# Altium PCB PCB.PcbDoc
Units mm, origin at the board's own origin, x right, y up, seen from the top; angles counter-clockwise.
Board outline 87.17 x 48.5 mm, 2 copper layers (Top Layer, Bottom Layer), stack 0.781 mm thick; 42 components, 27 nets, 111 pads, 0 vias.
Unrouted connection lines stored in the file: 63.
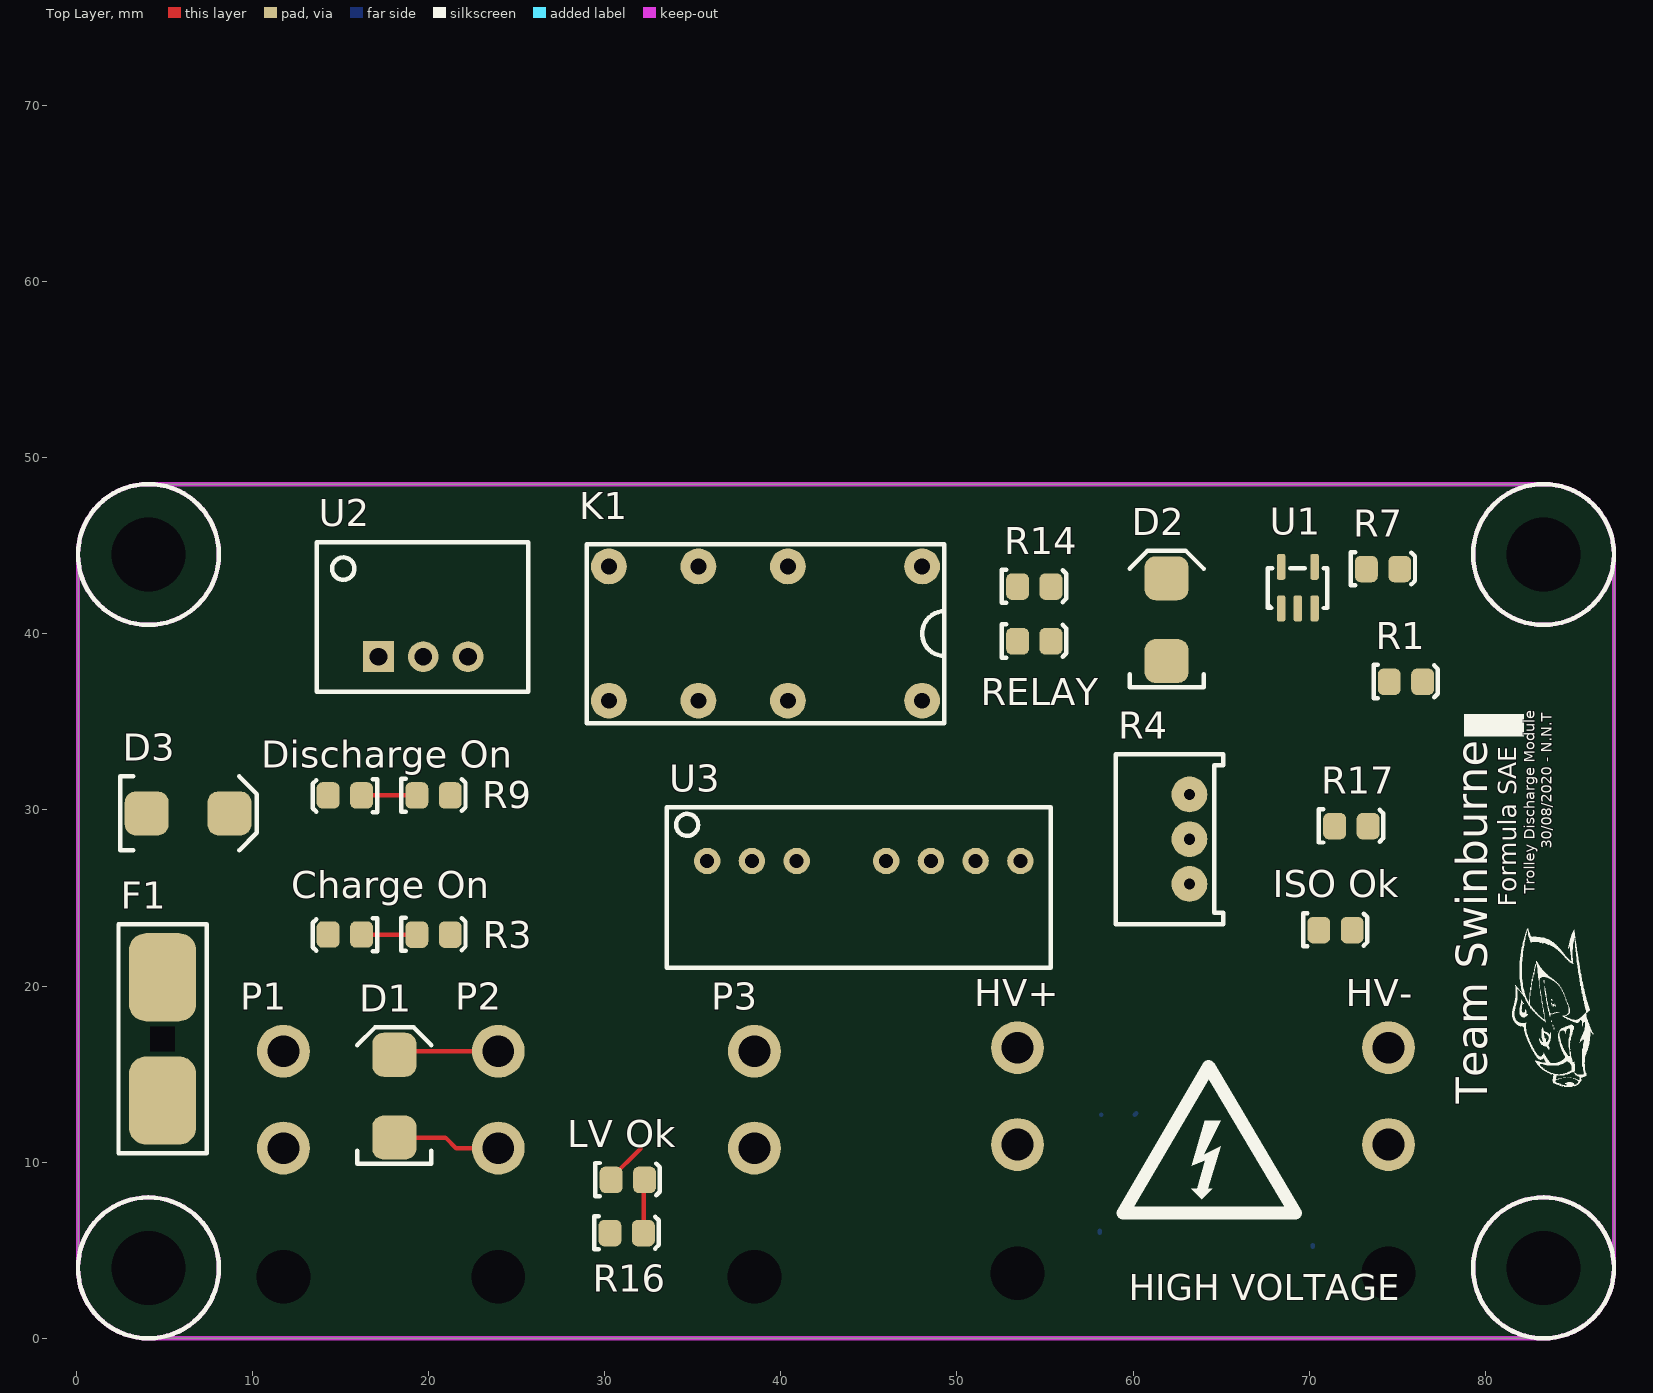
[diagram p0: Top Layer view]
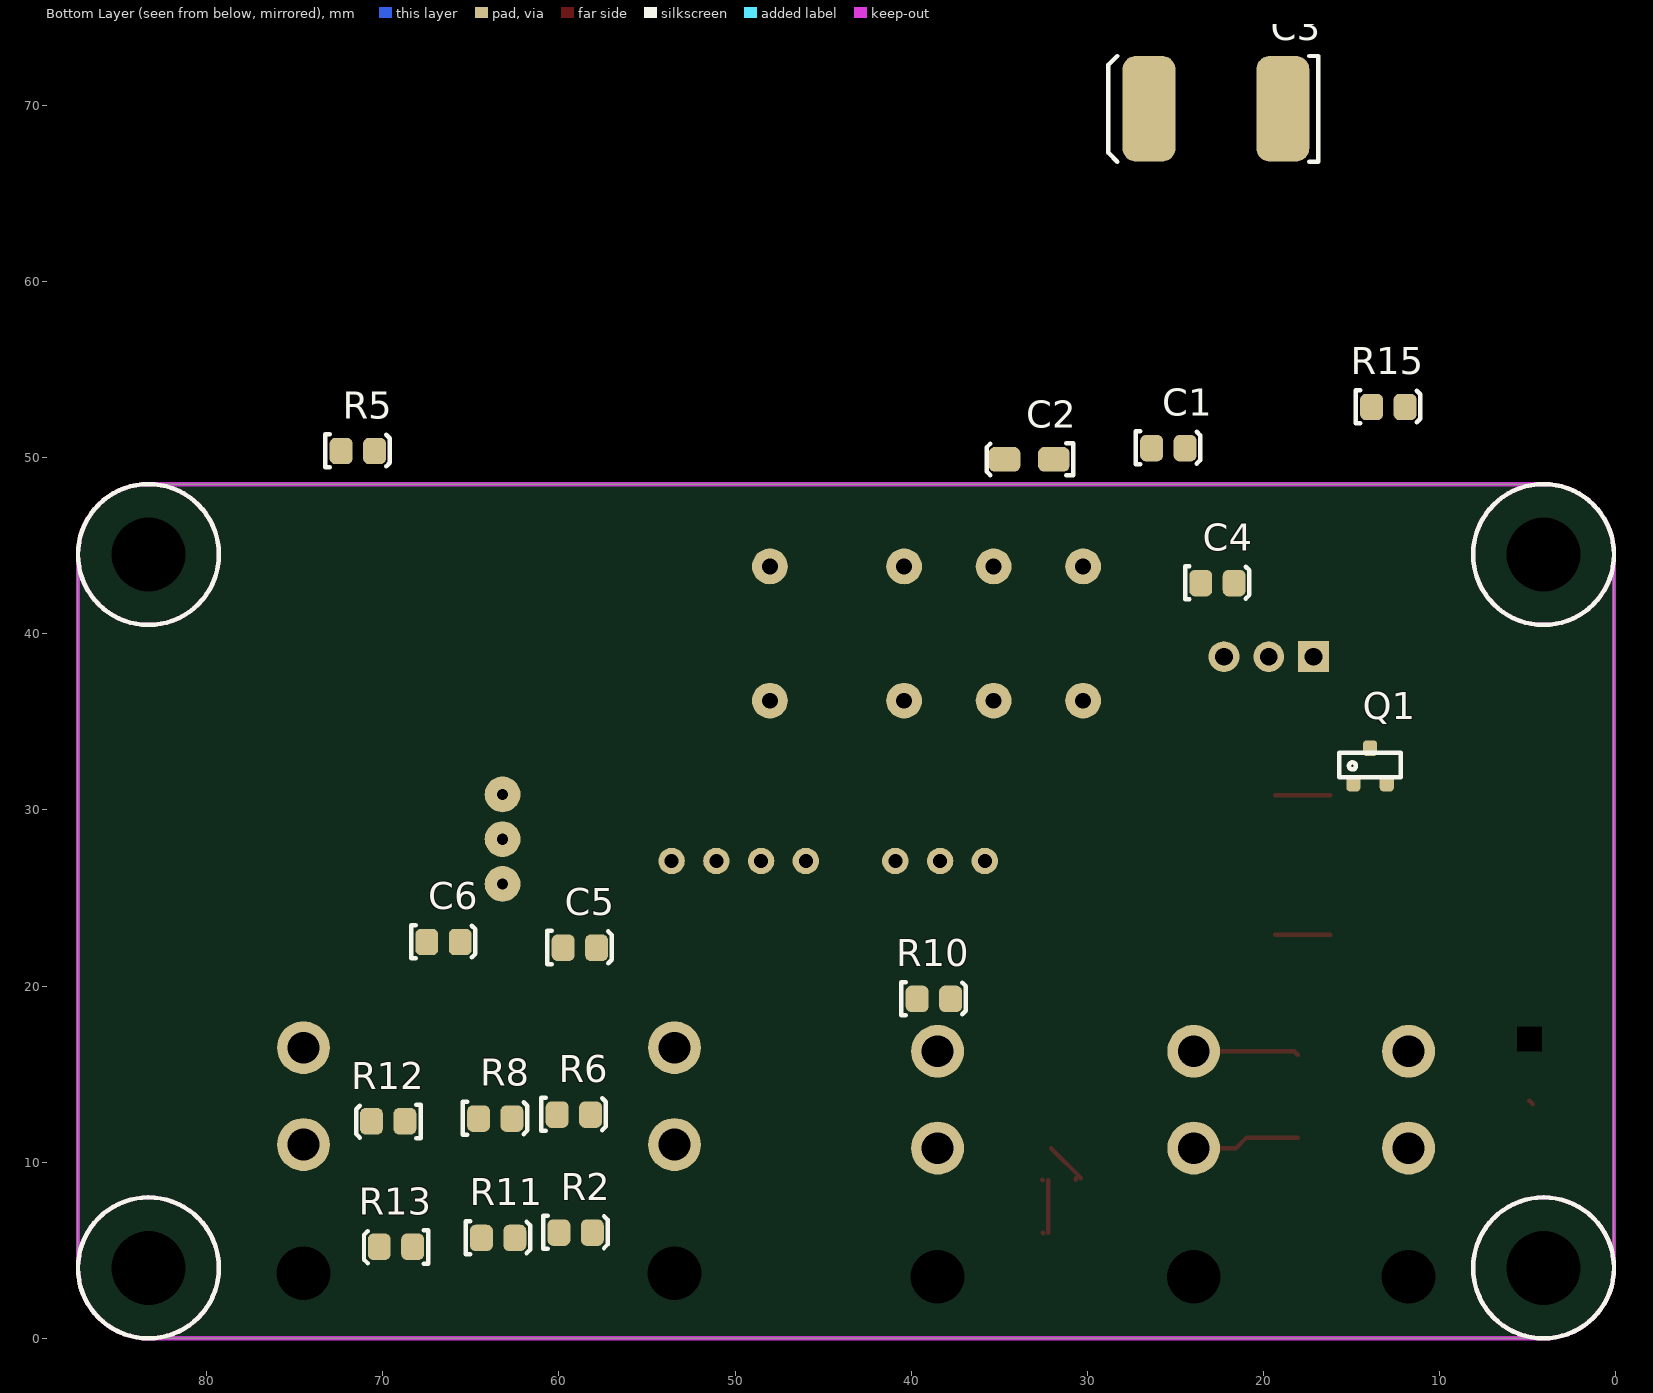
[diagram p1: Bottom Layer view, seen from below]

## Layer stack, top to bottom
Top Solder: solder mask 0.0254, SM-001, Dk 4
Top Layer: signal copper 0.035
Dielectric x: core 0.7112, Core-039, Dk 4.8
Bottom Layer: signal copper 0.035
Bottom Solder: solder mask 0.0254, SM-001, Dk 4

## Board outline
4.1,0 83.3,0 ccw(c83.3,4) 87.3,4 87.3,44.5 ccw(c83.3,44.5) 83.3,48.5 4.1,48.5 ccw(c4.1,44.527) 0.127,44.527 0.127,3.973 ccw(c4.1,3.973)

## Design rules (kind name [scope] priority, off if disabled: settings)
Clearance [All] p1: gap=0.254 ignorepadtopadclearanceinfootprint=FALSE except(0: Arc-Hole Track-Hole SMDPad-Hole THPad-Hole Via-Hole Fill-Hole Poly-Hole Region-Hole Text-Hole; 0.6: Poly-Poly)
PolygonConnect [All] p1: connectstyle=Relief reliefconductorwidth=0.254 reliefentries=4 polygonreliefangle="90 Angle" airgapwidth=0.254
RoutingVias [All] p1: holewidth=0.711 width=1.27 viastyle="Through Hole" minholewidth=0.711 minwidth=1.27 maxholewidth=0.711 maxwidth=1.27
SolderMaskExpansion [All] p1: expansion=0.102 istentingtop=FALSE
Width [All] p1: maxlimit=0.254 minlimit=0.254 preferedwidth=0.254
30 further rules are at their usual default settings.

## Classes and differential pairs
component class U_Switch: "Charge On" D2 "Discharge On" K1 P3 Q1 R1 R2 R3 R4 R5 R6 R7 R8 R9 R10 R11 R12 R13 R14 R15 RELAY U1
component class U_Power: C1 C2 C3 C4 C5 C6 F1 "ISO Ok" "LV Ok" R16 R17 RELAY U2 U3
component class "Top Level": D1 HV+ HV- P1 P2

## Components (designator, comment, footprint, x,y, rotation, side; value= is the part's Value field where it differs from the comment)
C1 "10uF" 0805 25.39,50.561 r180 bottom
C2 "22uF" 1206 34.5,49.9 r0 bottom
C3 "47uF" 2924 22.65,69.8 r0 bottom
C4 "100nF" 0805 22.6,42.9 r180 bottom
C5 "330nF" 0805 58.8,22.2 r180 bottom
C6 "10uF" 0805 66.538,22.526 r180 bottom
"Charge On" "Red" "0805 LED" 15.235,22.899 r180 top
D1 "SD560BTR" "SMB Diode" 18.062,11.65 r90 top
D2 "SD560BTR" "SMB Diode" 61.9,38.7 r90 top
D3 "SD560BTR" "SMB Diode" 4.25,29.8 r0 top
"Discharge On" "Red" "0805 LED" 15.235,30.796 r180 top
F1 "0154.750DR" "Omni BLOK 0154" 4.9,17 r270 top
HV+ "39300020" 39300020 53.438,11 r0 top
HV- "39300020" 39300020 74.5,11 r0 top
"ISO Ok" "Green" "0805 LED" 71.5,23.2 r0 top
K1 "V23105A5303A201" "TI 2-DIL" 39.13,40.01 r180 top
"LV Ok" "Green" "0805 LED" 31.324,9.026 r0 top (schematic designator D7)
P1 "39300020" 39300020 11.762,10.8 r0 top
P2 "39300020" 39300020 23.962,10.8 r0 top
P3 "39300020" 39300020 38.5,10.8 r0 top
Q1 "BC817-16LT1" "ON SOT-23 BJT" 13.95,32.5 r180 bottom
R1 "10k" 0805 75.5,37.3 r0 top
R2 "330k" 0805 59.038,6.026 r180 bottom
R3 "680R" 0805 20.297,22.946 r0 top
R4 "10K (Var)" "B 3296" 62.641,28.426 r90 top
R5 "4.7k" 0805 71.4,50.4 r180 bottom
R6 "330k" 0805 59.138,12.726 r180 bottom
R7 "6.8k" 0805 74.2,43.7 r0 top
R8 "330k" 0805 63.6,12.5 r180 bottom
R9 "680R" 0805 20.297,30.848 r0 top
R10 "10k" 0805 38.7,19.3 r180 bottom
R11 "330k" 0805 63.438,5.726 r180 bottom
R12 "10k" 0805 69.7,12.3 r0 bottom
R13 "10k" 0805 69.262,5.174 r0 bottom
R14 "1k" 0805 54.4,42.7 r0 top
R15 "4.7k" 0805 12.9,52.9 r180 bottom
R16 "1k" 0805 31.262,6 r0 top
R17 "1k" 0805 72.4,29.1 r0 top
RELAY "Red" "0805 LED" 54.4,39.6 r0 top (schematic designator "RELAY On")
U1 "TS391ILT" "ON SOT-23-5" 67.775,40.463 r0 top
U2 "R-78C12-1.0" "RECOM 3-SIP" 17.161,38.7 r0 top
U3 "TMR 3-1212WI" "TRECO 8-SIP" 33.53,21.05 r0 top

## Footprints (in the part's own frame and the unit in brackets; to place one, negate y for a bottom-side part, rotate by r counter-clockwise, add the part's x,y. Pads: shape width x height; smd on the part's side, far side on the other; paste and mask are expansions set on the pad)
0805 [mm]
  rrect50% 1.3x1.5 smd: 1(-0.962,-0.026) 2(0.938,-0.026)
  silkscreen extent -1.85,-0.95 1.8,0.93, body extent -1,-0.65 1,0.66, height 0.73
"0805 LED" [mm]
  rrect50% 1.3x1.5 smd: A(-0.962,-0.026) K(0.938,-0.026)
  silkscreen extent -1.85,-0.95 1.8,0.93, body extent -1.1,-0.62 0.9,0.63, height 1
1206 [mm]
  rrect50% 1.8x1.4 smd: 1(-2.6,0) 2(0.2,0)
  silkscreen extent -3.7,-0.9 1.2,0.9, body extent -2.9,-0.9 0.5,0.9, height 1.85
2924 [mm]
  rrect50% 3x6 smd: 1(-3.75,0) 2(3.85,0)
  silkscreen extent -5.75,-3 6.15,3, body extent -3.94,-2.81 4.04,2.81, height 1.14
39300020 [mm]
  round 3 hole 1.8: 1(0,0) 2(0,5.5)
  round 1.524 hole 3.05: ""(0,-7.3)
  body extent -2.7,-13.97 3.1,5.97, height 11.4
"B 3296" [mil]
  round 80 hole 25.2: 1(-103.39,-22) 2(-3.39,-22) 3(96.61,-22)
  silkscreen extent -193,-97 187,143, body extent -191,-97 184,143, height 455
"Omni BLOK 0154" [mm]
  rrect50% 5x3.81 smd: 1(3.5,0) 2(-3.5,0)
  rect 0x0 hole 1.4 square unplated: 3(0,0)
  silkscreen extent -6.5,-2.5 6.5,2.5, body extent -4.93,-2.52 4.9,2.51, height 3.81
"ON SOT-23 BJT" [mm] "NUP2105L"
  rrect50% 0.8x0.9 smd: B(-0.95,-1) C(0,1) E(0.95,-1)
  silkscreen extent -1.75,-0.65 1.75,0.75, body extent -1.5,-1.28 1.5,1.27, height 1
"ON SOT-23-5" [mil]
  rrect50% 19x58 smd: 1(24.61,38.39) 2(62.01,38.39) 3(99.41,38.39) 4(99.41,131.39) 5(24.61,131.39)
  silkscreen extent -5,39 128,128, body extent 2,27 122,145, height 57
"RECOM 3-SIP" [mm] "12 to 42 Vdc In, 9 Vdc Out"
  rect 1.75x1.75 hole 1: 1(0,0)
  round 1.75 hole 1: 2(2.54,0) 3(5.08,0)
  silkscreen extent -3.5,-2 8.5,6.5, body extent -3.26,-2.02 8.34,6.48, height 11.41
"SMB Diode" [mm]
  rrect50% 2.5x2.5 smd: A(-0.25,0) K(4.45,0)
  silkscreen extent -1.75,-2.1 6,2.1, body extent -0.69,-1.97 4.9,1.97, height 2.5
"TI 2-DIL" [mil]
  round 80 hole 35.43: 1(-350,-150) 4(-50,-150) 6(150,-150) 8(350,-150) 9(350,150) 11(150,150) 13(-50,150) 16(-350,150)
  silkscreen extent -400,-200 400,200, body extent -398,-197 398,197, height 450
"TRECO 8-SIP" [mm]
  round 1.5 hole 0.8: 1(2.29,6.05) 2(4.83,6.05) 3(7.37,6.05) 5(12.45,6.05) 6(14.99,6.05) 7(17.53,6.05) 8(20.07,6.05)
  silkscreen extent 0,0 21.8,9.1, body extent 0,0 21.8,9.1, height 11.2

## Part data
C1 C6: library part GRM21BR6YA106KE43L, Digikey Part Number=490-10514-6-ND, Manufacturer=muRata, Rated Voltage=50V, Tolerance=10%, Material=X5R, Part Number=GRM21BR6YA106KE43L
C2: library part CC1206MKX5R7BB226, Digikey Part Number=311-1997-2-ND, Manufacturer=YAGEO, Rated Voltage=16V, Tolerance=20%, Material=Ceramic, Part Number=CC1206MKX5R7BB226
C3: library part TAJV476K035RNJ, Digikey Part Number=478-8934-1-ND, Manufacturer="AVX Corporation", Rated Voltage=35V, Tolerance=10%, Material=Tantalum, Part Number=TAJV476K035RNJ
C4: library part GCM21BR71H104KA37L, Digikey Part Number=490-6064-1-ND, Manufacturer=muRata, Rated Voltage=50V, Tolerance=±10%, Material=X7R, Part Number=GCM21BR71H104KA37L
C5: library part GCM219R71H334KA55D, Digikey Part Number=490-8045-1-ND, Manufacturer=muRata, Rated Voltage=50V, Tolerance=±10%, Material=X7R, Part Number=GCM219R71H334KA55D
"Charge On" "Discharge On" RELAY: library part SML-210LTT86, "Red LED Indication - Discrete 1.75V 0805 (2012 Metric)", Digikey Part Number=511-1286-1-ND, Manufacturer="ROHM Semiconductor", Colour=Red, Digikey Link=https://www.digikey.com/product-detail/en/rohm-semiconductor/SML-210LTT86/511-1286-1-ND/637099, Part Number=SML-210LTT86
D1 D2 D3: "1.2V_F 600V 5A SMB", Digikey Part Number=1655-1530-2-ND, Manufacturer="SMC Diode Solutions", Digikey Link=https://www.digikey.com/product-detail/en/smc-diode-solutions/SD560BTR/1655-1530-2-ND/6022620, Part Number=SD560BTR
F1: "FUSE BOARD MNT 750MA 125VAC/VDC", Digikey Part Number=F1221CT-ND, Manufacturer="LittelFuse Inc", Digikey Link=https://www.digikey.com/product-detail/en/littelfuse-inc/0154.750DR/F1221CT-ND/183370, Part Number=0154.750DR
HV+ HV- P1 P2 P3: Digikey Part Number=WM21351-ND, Angle=90, Contact=Tin, Flange=No, Part Number=39300020, Pitch=4.2mm, Positions=2, Row Spacing=5.5mm
"ISO Ok" "LV Ok": library part SML-210FTT86, "Green LED Indication - Discrete 1.75V 0805 (2012 Metric)", Digikey Part Number=511-1285-1-ND, Manufacturer="ROHM Semiconductor", Colour=Green, Digikey Link=https://www.digikey.com/product-detail/en/rohm-semiconductor/SML-210FTT86/511-1285-1-ND/637098, Part Number=SML-210FTT86
K1: "RELAY TELECOM DPDT 3A 12V", Digikey Part Number=PB387-ND, Manufacturer="TE Connectivity", Digikey Link=https://www.digikey.com/product-detail/en/te-connectivity-potter-brumfield-relays/V23105A5303A201/PB387-ND/291023, Part Number=V23105A5303A201
Q1: "300mW  BJT NPN Transistor", Digikey Part Number=BC817-16LT1OSTR-ND, Manufacturer="ON Semiconductor", Digikey Link=https://www.digikey.com.au/product-detail/en/on-semiconductor/BC817-16LT1/BC817-16LT1OSTR-ND/606178, Part Number=BC817-16LT1
R1 R10 R12 R13: library part RC0805FR0710KL, Digikey Part Number=311-10.0KCRCT-ND, Manufacturer=YAGEO, Rated Voltage=0.125W, Tolerance=0.01, Material=FR-07, Part Number=RC0805FR0710KL
R2 R6 R8 R11: library part RC0805FR07330KL, Digikey Part Number=311-330KCRCT-ND, Manufacturer=YAGEO, Rated Voltage=0.125W, Tolerance=0.01, Material=FR-07, Part Number=RC0805FR07330KL
R3 R9: library part RC0805FR07680RL, Digikey Part Number=311-680CRCT-ND, Manufacturer=YAGEO, Rated Voltage=0.125W, Tolerance=0.01, Material=FR-07, Part Number=RC0805FR07680RL
R4: library part 3296W-1-103LF, Digikey Part Number=3296W-103LF-ND, Manufacturer="Bournes Inc", Rated Voltage=0.5W, Tolerance=0.1, Part Number=3296W-1-103LF
R5 R15: library part RC0805FR074K7L, Digikey Part Number=311-4.70KCRCT-ND, Manufacturer=YAGEO, Rated Voltage=0.125W, Tolerance=0.01, Material=FR-07, Part Number=RC0805FR074K7L
R7: library part RC0805FR076K8L, Digikey Part Number=311-6.80KCRCT-ND, Manufacturer=YAGEO, Rated Voltage=0.125W, Tolerance=0.01, Material=FR-07, Part Number=RC0805FR076K8L
R14 R16 R17: library part RC0805FR071KL, Digikey Part Number=311-1.00KCRCT-ND, Manufacturer=YAGEO, Rated Voltage=0.125W, Tolerance=0.01, Material=FR-07, Part Number=RC0805FR071KL
U1: "IC COMP LO PWR SGL V SOT 23-5L", Digikey Part Number=497-2275-2-ND, Manufacturer=STMicroelectronics, Digikey Link=https://www.digikey.com/product-detail/en/stmicroelectronics/TS391ILT/497-2275-2-ND/599407, Part Number=TS391ILT
U2: "3PIN DC DC CONVERTER 12V 12W", Digikey Part Number=945-1392-5-ND, Manufacturer=Recom, Digikey Link=https://www.digikey.com/products/en/power-supplies-board-mount/dc-dc-converters/922?k=R-78C&k=&pkeyword=R-78C&sv=0&pv1525=44&sf=0&FV=ffe0039a&quantity=&ColumnSort=0&page=1&pageSize=25, Isolation=Non-Isolated, Part Number=R-78C12-1.0
U3: "DC DC CONVERTER 12V 3W", Digikey Part Number=1951-2367-ND, Manufacturer="Traco Power", Digikey Link=https://www.digikey.com.au/product-detail/en/traco-power/TMR-3-1212WI/1951-2367-ND/9383402, Isolation=Isolated, Part Number="TMR 3-1212WI"

## Free pads (board coordinates)
  round 0 hole 4.2 unplated: 2(4.1,4) 2(4.1,44.5) 2(83.3,4) 2(83.3,44.5)

## Nets (pads, with @x,y where several pads share a name; then routed paths per layer and width w, separated by ;. In a path a pad name is that pad's centre, name@x,y a point inside that pad or via, vN(x,y) a via of type N, cw(c..) or ccw(c..) an arc to the next point about the centre after c; other vN are vias at no path point)
0V: "Charge On.K" C1.1 C2.1 C3.1 C4.1 D1.A P1.1 P2.1 Q1.E R10.1 R15.2 R16.1 U2.2 U3.1 | length 6.1
  Top Layer w0.254: D1.A 20.962,11.4 21.562,10.8 P2.1
"0V (ISO)": C5.1 C6.1 R7.1 R17.1 U1.2 U3.7
12V: "LV Ok.A" C2.2 P3.1 R3.2 U2.3 | length 2.5
  Top Layer w0.254: 30.362,9.1 32.062,10.8 ; 30.662,9 30.662,9.1
"12V (ISO)": "ISO Ok.A" C5.2 C6.2 D2.K K1.1 R1.2 R5.2 R14.2 U1.5 U3.6
HV+: HV+.1 HV+.2 R2.2 | length 0.1
  Bottom Layer w0.254: R2.2 R2.2@58.1,6.1
HV-: HV-.1 HV-.2 R13.2 | length 0.1
  Bottom Layer w0.254: R13.2 R13.2@70.2,5.3
LV: C1.2 C3.2 C4.2 D3.K U2.1 U3.2
"NetCharge On_A": "Charge On.A" Q1.C R3.1 | length 3.1
  Top Layer w0.254: 16.197,22.925 16.2,22.922 19.332,22.922 R3.1
NetD1_K: D1.K K1.13 P2.2 | length 6
  Top Layer w0.254: D1.K 18.262,16.3 P2.2
NetD2_A: D2.A K1.16 R5.1 RELAY.K U1.1
NetD3_A: D3.A F1.2
"NetDischarge On_A": "Discharge On.A" R9.1 | length 3.1
  Top Layer w0.254: 16.197,30.822 R9.1
"NetDischarge On_K": "Discharge On.K" Q1.B R10.2
NetF1_1: F1.1 P1.2 | length 0.3
  Top Layer w0.254: F1.1@4.7,13.3 F1.1
"NetISO Ok_K": "ISO Ok.K" R17.2
NetK1_9: K1.9 P3.2 R9.2
NetK1_11: K1.11 R15.1
"NetLV Ok_K": "LV Ok.K" R16.2 | length 3.1
  Top Layer w0.254: R16.2@32.231,6.005 32.231,8.969 ; R16.2@32.5,5.974 R16.2@32.531,6.005 ; 32.531,8.969 32.562,9
NetR1_1: R1.1 R4.1
NetR2_1: R2.1 R6.2 | length 0
NetR4_2: R4.2 U1.4
NetR4_3: R4.3 R7.2
NetR6_1: R6.1 R8.2 | length 0.2
  Bottom Layer w0.254: R6.1 R6.1@60.187,12.787 ; R8.2@62.575,12.387 R8.2
NetR8_1: R8.1 R11.2
NetR11_1: R11.1 R12.1 U1.3
NetR12_2: R12.2 R13.1
NetR14_1: R14.1 RELAY.A
pads on no net: F1.3 HV+. HV-. K1.4 K1.6 K1.8 P1. P2. P3. U3.3 U3.5 U3.8

## Keep-outs
Keep-Out Layer:
  circle w0.254: c83.3,44.5 r4
  circle w0.254: c83.3,4 r4
  circle w0.254: c4.1,4 r4
  circle w0.254: c4.1,44.5 r4
  lines w0.254: 0.1,3.9 0.1,44.6 ; 4,0 83.3,0 ; 4.1,48.5 83.2,48.5 ; 87.3,4 87.3,44.7

## Silkscreen, mask and mechanical layers (free items; w line width, h text height)
Top Overlay:
  drawing of 28 lines, arcs and shapes, not listed
  text "30/08/2020 - N.N.T" at 83.978,27.79 h1.02 r90
  text "Trolley Discharge Module" at 83,25.238 h1.02 r90
  text "Formula SAE" at 82.1,24.5 h1.78 r90
  text "Team Swinburne" at 80.703,13.324 h3.05 r90
  text "HIGH VOLTAGE" at 59.759,2.151 h1.47
Bottom Overlay:
  circle w0.254: c4.1,4 r4
  circle w0.254: c4.1,44.5 r4
  circle w0.254: c83.3,4 r4
  circle w0.254: c83.3,44.5 r4